# EAGLE board lrdboard_358v1 (EAGLE 6.3)
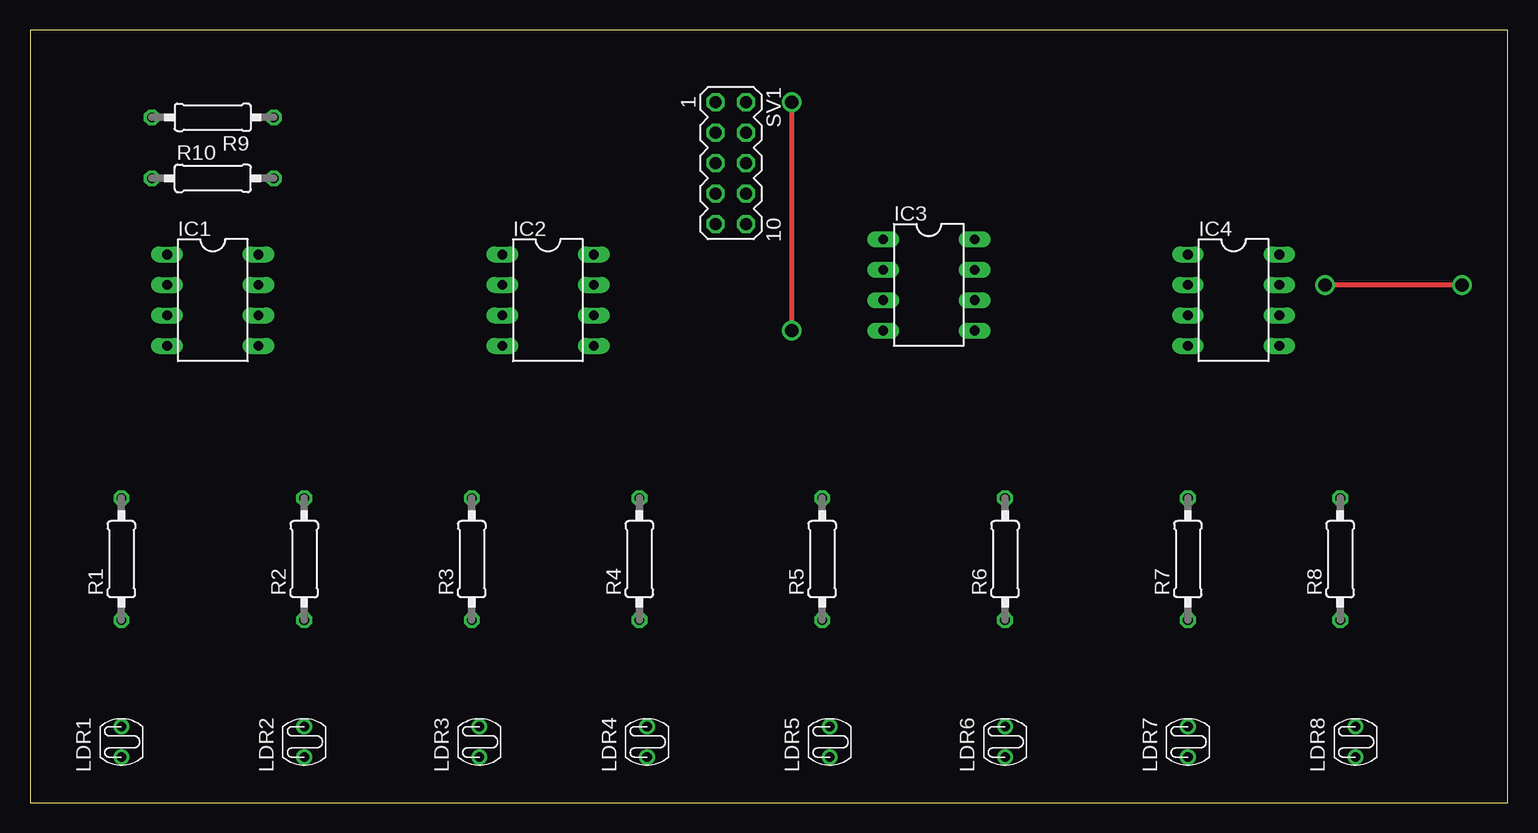
[diagram p0: board, top side]
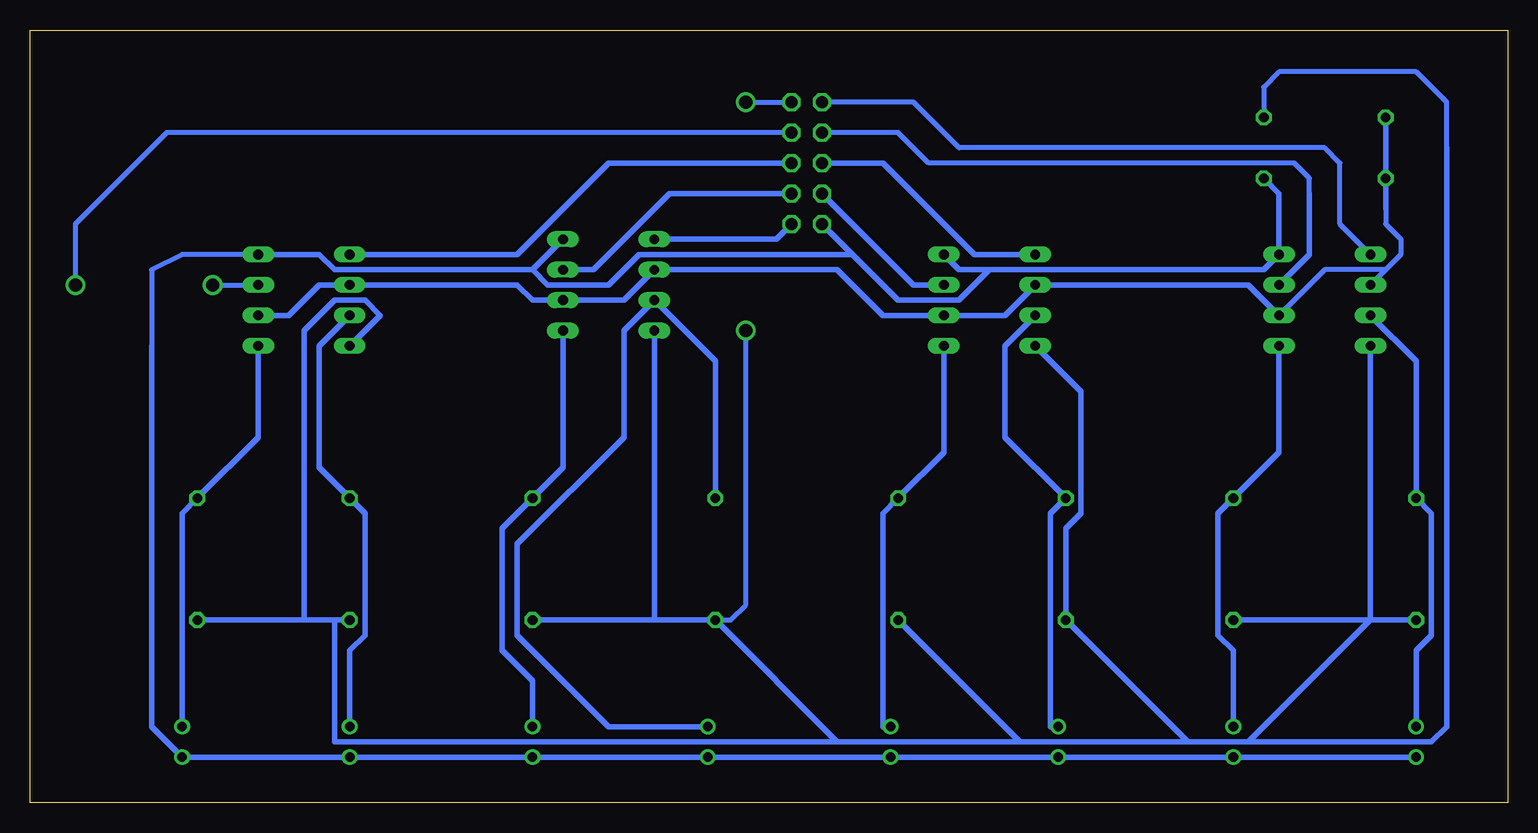
[diagram p1: board, bottom side, seen from below]

Size 123.17 x 64.44 mm. Coordinates in mm from the lower left corner, seen from the top.
Outline: 0,0 123.17,0 123.17,64.44 0,64.44 0,0
Copper layers (1*16): Top 0.035mm / dielectric 1.5mm / Bottom 0.035mm
Design rules "default *": minimum track width 18mil, minimum drill 24mil, track to track 20mil, track to pad 15mil, pad to pad 8mil, via to via 8mil, smd to smd 8mil, copper to edge 40mil, drill to drill 8mil, minimum pad ring 10mil, minimum via ring 8mil, stop-mask expansion 4mil, vias tented up to drill 0mil, thermal gap 10mil

## Footprints (pad centres in the part's own frame; a part is rotated, then mirrored left to right if it is on the bottom)
DIL08 = drill 0.813 long: 1 -3.81,-3.81; 2 -1.27,-3.81; 3 1.27,-3.81; 4 3.81,-3.81; 5 3.81,3.81; 6 1.27,3.81; 7 -1.27,3.81; 8 -3.81,3.81
LDR3MM = drill 0.8: P$1 0,0; P$2 2.54,0
0207/10 = drill 0.813 octagon: 1 -5.08,0; 2 5.08,0
MA05-2 = drill 1.016 octagon: 1 -5.08,-1.27; 2 -5.08,1.27; 3 -2.54,-1.27; 4 -2.54,1.27; 5 0,-1.27; 6 0,1.27; 7 2.54,-1.27; 8 2.54,1.27; 9 5.08,-1.27; 10 5.08,1.27

## Placement (x,y rotation side)
IC1  LM358N  [DIL08]  15.24,41.91 270 top
IC2  LM358N  [DIL08]  43.18,41.91 270 top
IC3  LM358N  [DIL08]  74.93,43.18 270 top
IC4  LM358N  [DIL08]  100.33,41.91 270 top
LDR1  CDSLDR3MM  [LDR3MM]  7.62,3.81 90 top
LDR2  CDSLDR3MM  [LDR3MM]  22.86,3.81 90 top
LDR3  CDSLDR3MM  [LDR3MM]  37.47,3.81 90 top
LDR4  CDSLDR3MM  [LDR3MM]  51.44,3.81 90 top
LDR5  CDSLDR3MM  [LDR3MM]  66.67,3.81 90 top
LDR6  CDSLDR3MM  [LDR3MM]  81.28,3.81 90 top
LDR7  CDSLDR3MM  [LDR3MM]  96.52,3.81 90 top
LDR8  CDSLDR3MM  [LDR3MM]  110.49,3.81 90 top
R1  [0207/10]  7.62,20.32 90 top
R2  [0207/10]  22.86,20.32 90 top
R3  [0207/10]  36.83,20.32 90 top
R4  [0207/10]  50.8,20.32 90 top
R5  [0207/10]  66.04,20.32 90 top
R6  [0207/10]  81.28,20.32 90 top
R7  [0207/10]  96.52,20.32 90 top
R8  [0207/10]  109.22,20.32 90 top
R9  [0207/10]  15.24,57.15 180 top
R10  [0207/10]  15.24,52.07 0 top
SV1  [MA05-2]  58.42,53.34 270 top

## Library data of the parts
IC1-IC4 LDR1-LDR8 R1-R10 = CEDTv69
SV1 = con-lstb; OC_FARNELL: unknown; OC_NEWARK: unknown

## Nets
1: IC1.3 LDR1.P$2 R1.2
2: IC1.5 LDR2.P$2 R2.2
3: IC2.3 LDR3.P$2 R3.2
4: IC2.5 LDR4.P$2 R4.2
5: IC3.3 LDR5.P$2 R5.2
6: IC3.5 LDR6.P$2 R6.2
7: IC4.3 LDR7.P$2 R7.2
8: IC4.5 LDR8.P$2 R8.2
+5V: IC1.8 IC2.8 IC3.8 IC4.8 LDR1.P$1 LDR2.P$1 LDR3.P$1 LDR4.P$1 LDR5.P$1 LDR6.P$1 LDR7.P$1 LDR8.P$1 R10.2 SV1.9
GND: IC1.4 IC2.4 IC3.4 IC4.4 R1.1 R2.1 R3.1 R4.1 R5.1 R6.1 R7.1 R8.1 R9.1 SV1.2
MID: IC1.2 IC1.6 IC2.2 IC2.6 IC3.2 IC3.6 IC4.2 IC4.6 R9.2 R10.1
OUT1: IC1.1 SV1.1
OUT2: IC1.7 SV1.3
OUT3: IC2.1 SV1.5
OUT4: IC2.7 SV1.7
OUT5: IC3.1 SV1.10
OUT6: IC3.7 SV1.8
OUT7: IC4.1 SV1.6
OUT8: IC4.7 SV1.4

## Tracks (layer width: path | path; a pad name or v marks a point on that pad's centre or on a via)
1
  Bottom 0.457: LDR1.P$2 7.62,12.7 6.35,13.97 6.35,24.13 R1.2 7.62,36.83 IC1.3
2
  Bottom 0.457: LDR2.P$2 22.86,12.7 24.13,13.97 24.13,24.13 R2.2 19.05,29.21 IC1.5
3
  Bottom 0.457: LDR3.P$2 38.1,6.35 38.1,24.13 R3.2 41.91,30.48 41.91,38.1 IC2.3
4
  Bottom 0.457: LDR4.P$2 52.07,6.35 52.07,24.13 R4.2 46.99,29.21 IC2.5
5
  Bottom 0.457: LDR5.P$2 74.93,6.35 82.55,13.97 82.55,21.59 73.66,30.48 73.66,39.37 IC3.3 66.04,36.83 R5.2
6
  Bottom 0.457: LDR6.P$2 81.28,10.16 83.82,12.7 83.82,22.86 R6.2 78.74,27.94 IC3.5
7
  Bottom 0.457: LDR7.P$2 96.52,12.7 95.25,13.97 95.25,24.13 R7.2 99.06,27.94 99.06,38.1 IC4.3
8
  Bottom 0.457: LDR8.P$2 110.49,24.13 R8.2 104.14,30.48 IC4.5
+5V
  Bottom 0.406: IC4.8 110.49,45.72 113.03,44.45 113.03,38.1
  Bottom 0.457: IC4.8 99.06,45.72 97.79,44.45 81.28,44.45 | IC3.8 81.28,44.45 | R10.2 19.05,50.8 IC1.8 20.32,44.45 43.18,44.45 | IC2.8 45.72,44.45 43.18,44.45 | 54.61,45.72 50.8,41.91 45.72,41.91 43.18,44.45 | 54.61,45.72 SV1.9 | 81.28,44.45 80.01,43.18 74.93,43.18 72.39,45.72 54.61,45.72 | LDR1.P$1 LDR2.P$1 LDR3.P$1 LDR4.P$1 LDR5.P$1 LDR6.P$1 LDR7.P$1 LDR8.P$1 113.03,6.35 113.03,38.1
GND  (via drill 1.1 pad 1.42)
  Top 0.406: v63.5,39.37 v63.5,58.42
  Bottom 0.406: 5.08,54.61 5.08,58.42 7.62,60.96 19.05,60.96 20.32,59.69 R9.1 | R5.1 64.77,15.24 63.5,16.51 v63.5,39.37 | v63.5,58.42 SV1.2
  Bottom 0.457: R6.1 71.12,15.24 | 71.12,15.24 R5.1 55.88,5.08 | 71.12,15.24 IC3.4 | R8.1 100.33,15.24 | 100.33,15.24 97.79,15.24 | 97.79,15.24 R7.1 | IC4.4 93.98,40.64 95.25,41.91 97.79,41.91 100.33,39.37 100.33,15.24 | IC2.4 35.56,34.29 35.56,24.13 36.83,22.86 R3.1 26.67,5.08 | R2.1 11.43,15.24 | 11.43,15.24 R1.1 | 40.64,5.08 R4.1 | 21.59,5.08 26.67,5.08 | 26.67,5.08 40.64,5.08 | 11.43,15.24 21.59,5.08 | 11.43,15.24 IC1.4 | 97.79,15.24 97.79,5.08 55.88,5.08 | 40.64,5.08 55.88,5.08 | 5.08,54.61 5.08,6.35 6.35,5.08 21.59,5.08
MID
  Bottom 0.406: 10.16,49.53 10.16,48.26 8.89,46.99 8.89,45.72 10.16,44.45 | 10.16,44.45 15.24,44.45 IC1.6 | 10.16,44.45 IC1.2
  Bottom 0.457: IC4.6 101.6,40.64 99.06,43.18 IC4.2 82.55,43.18 81.28,41.91 IC3.6 73.66,41.91 IC3.2 55.88,44.45 52.07,40.64 IC2.6 41.91,40.64 IC2.2 21.59,43.18 IC1.6 | 10.16,49.53 R10.1 R9.2
OUT1
  Bottom 0.406: IC1.1 13.97,48.26 13.97,53.34 15.24,54.61 45.72,54.61 49.53,58.42 SV1.1
OUT2
  Bottom 0.406: 16.51,50.8 16.51,52.07 17.78,53.34 48.26,53.34 50.8,55.88 SV1.3
  Bottom 0.457: IC1.7 16.51,45.72 16.51,50.8
OUT3
  Bottom 0.457: IC2.1 44.45,45.72 52.07,53.34 SV1.5
OUT4
  Bottom 0.457: IC2.7 49.53,43.18 SV1.7
OUT5
  Bottom 0.457: IC3.1 60.96,46.99 SV1.10
OUT6
  Bottom 0.457: IC3.7 76.2,44.45 69.85,50.8 SV1.8
OUT7
  Bottom 0.457: IC4.1 82.55,45.72 74.93,53.34 SV1.6
OUT8  (via drill 0.6, 1.1 pad 1.42)
  Top 0.406: v119.38,43.18 v107.95,43.18
  Bottom 0.406: SV1.4 111.76,55.88 119.38,48.26 v119.38,43.18 | v107.95,43.18 IC4.7